# Altium PCB FIT2017 Uno Shield.PcbDoc
Units mil, origin at the board's own origin, x right, y up, seen from the top; angles counter-clockwise.
Board outline 2600 x 2100 mil, 2 copper layers (Top Layer, Bottom Layer); 9 components, 34 nets, 58 pads, 4 vias.
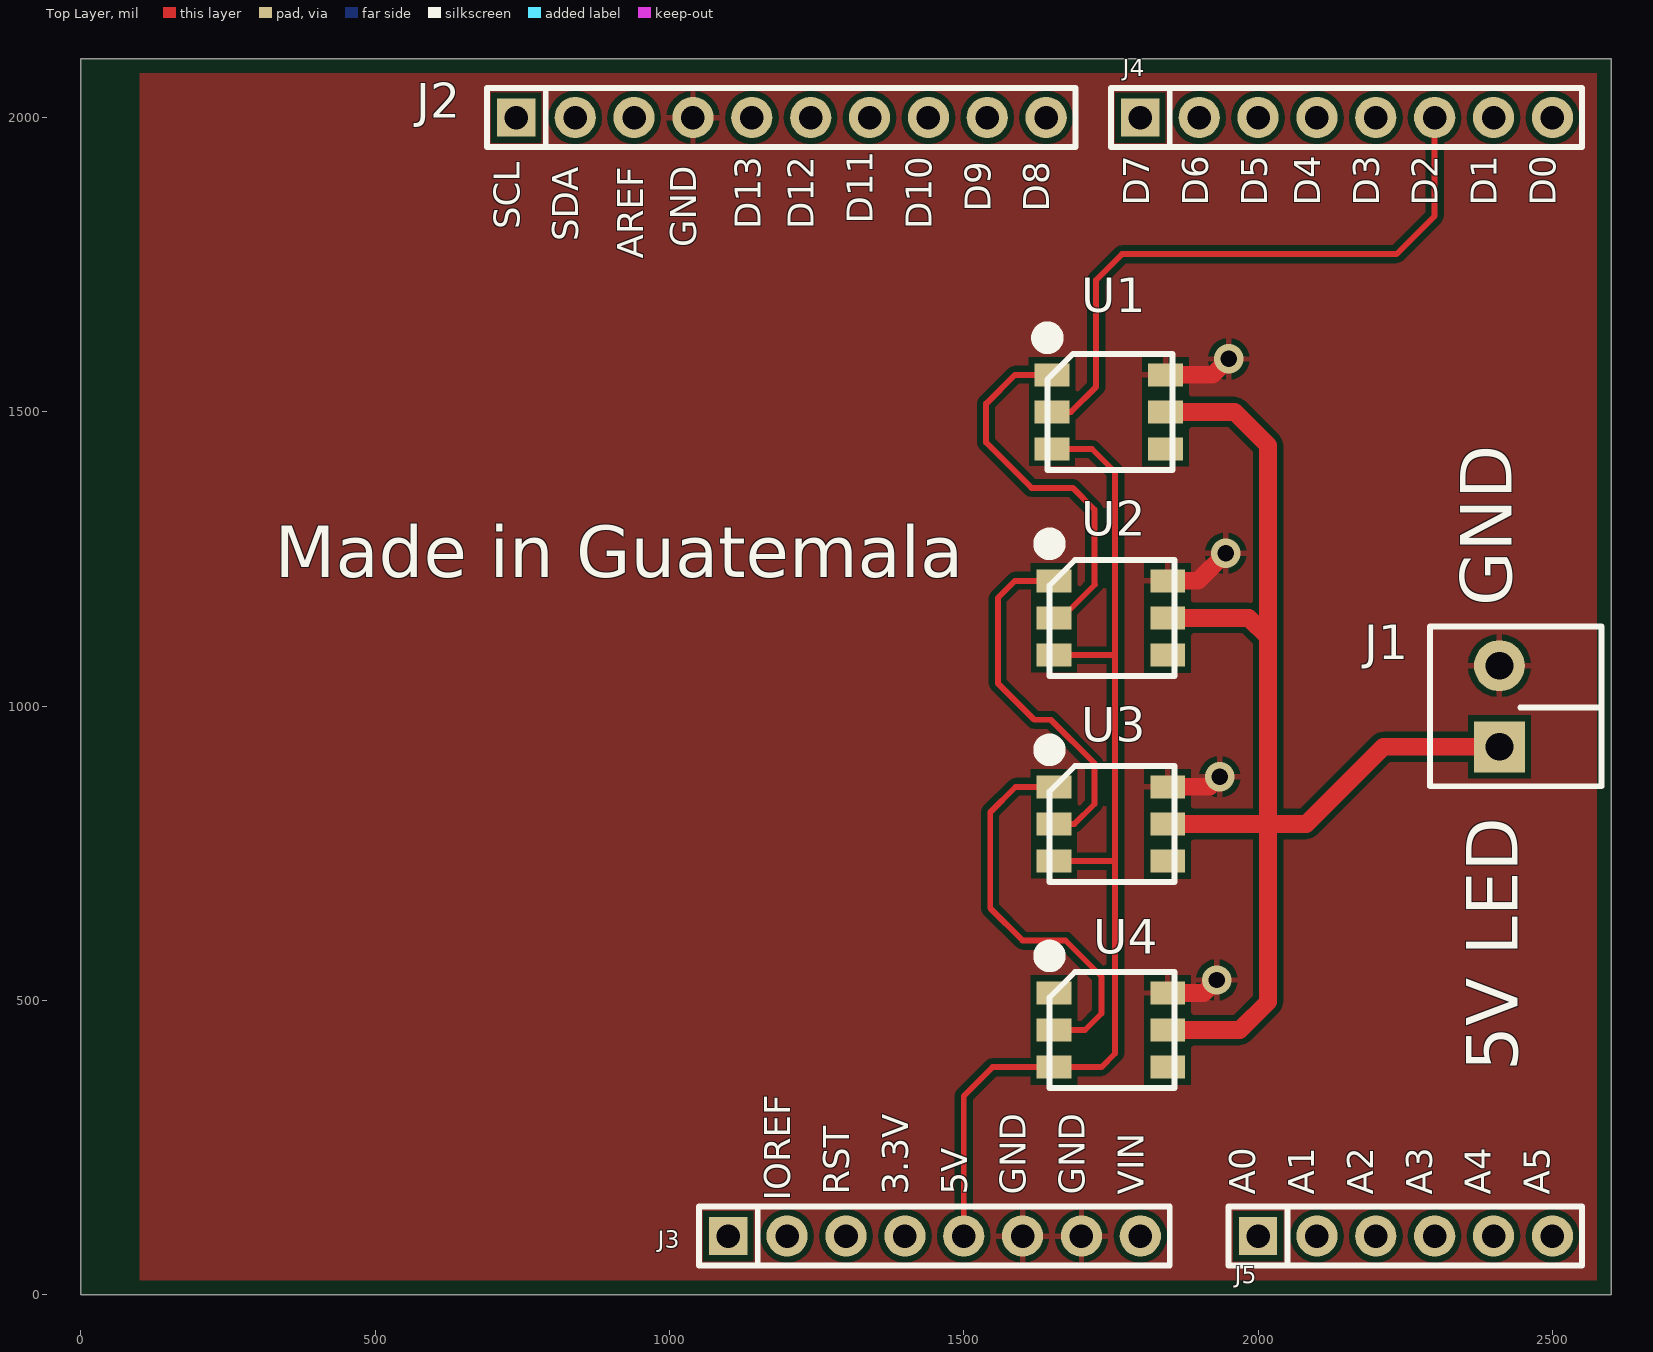
[diagram p0: Top Layer view]
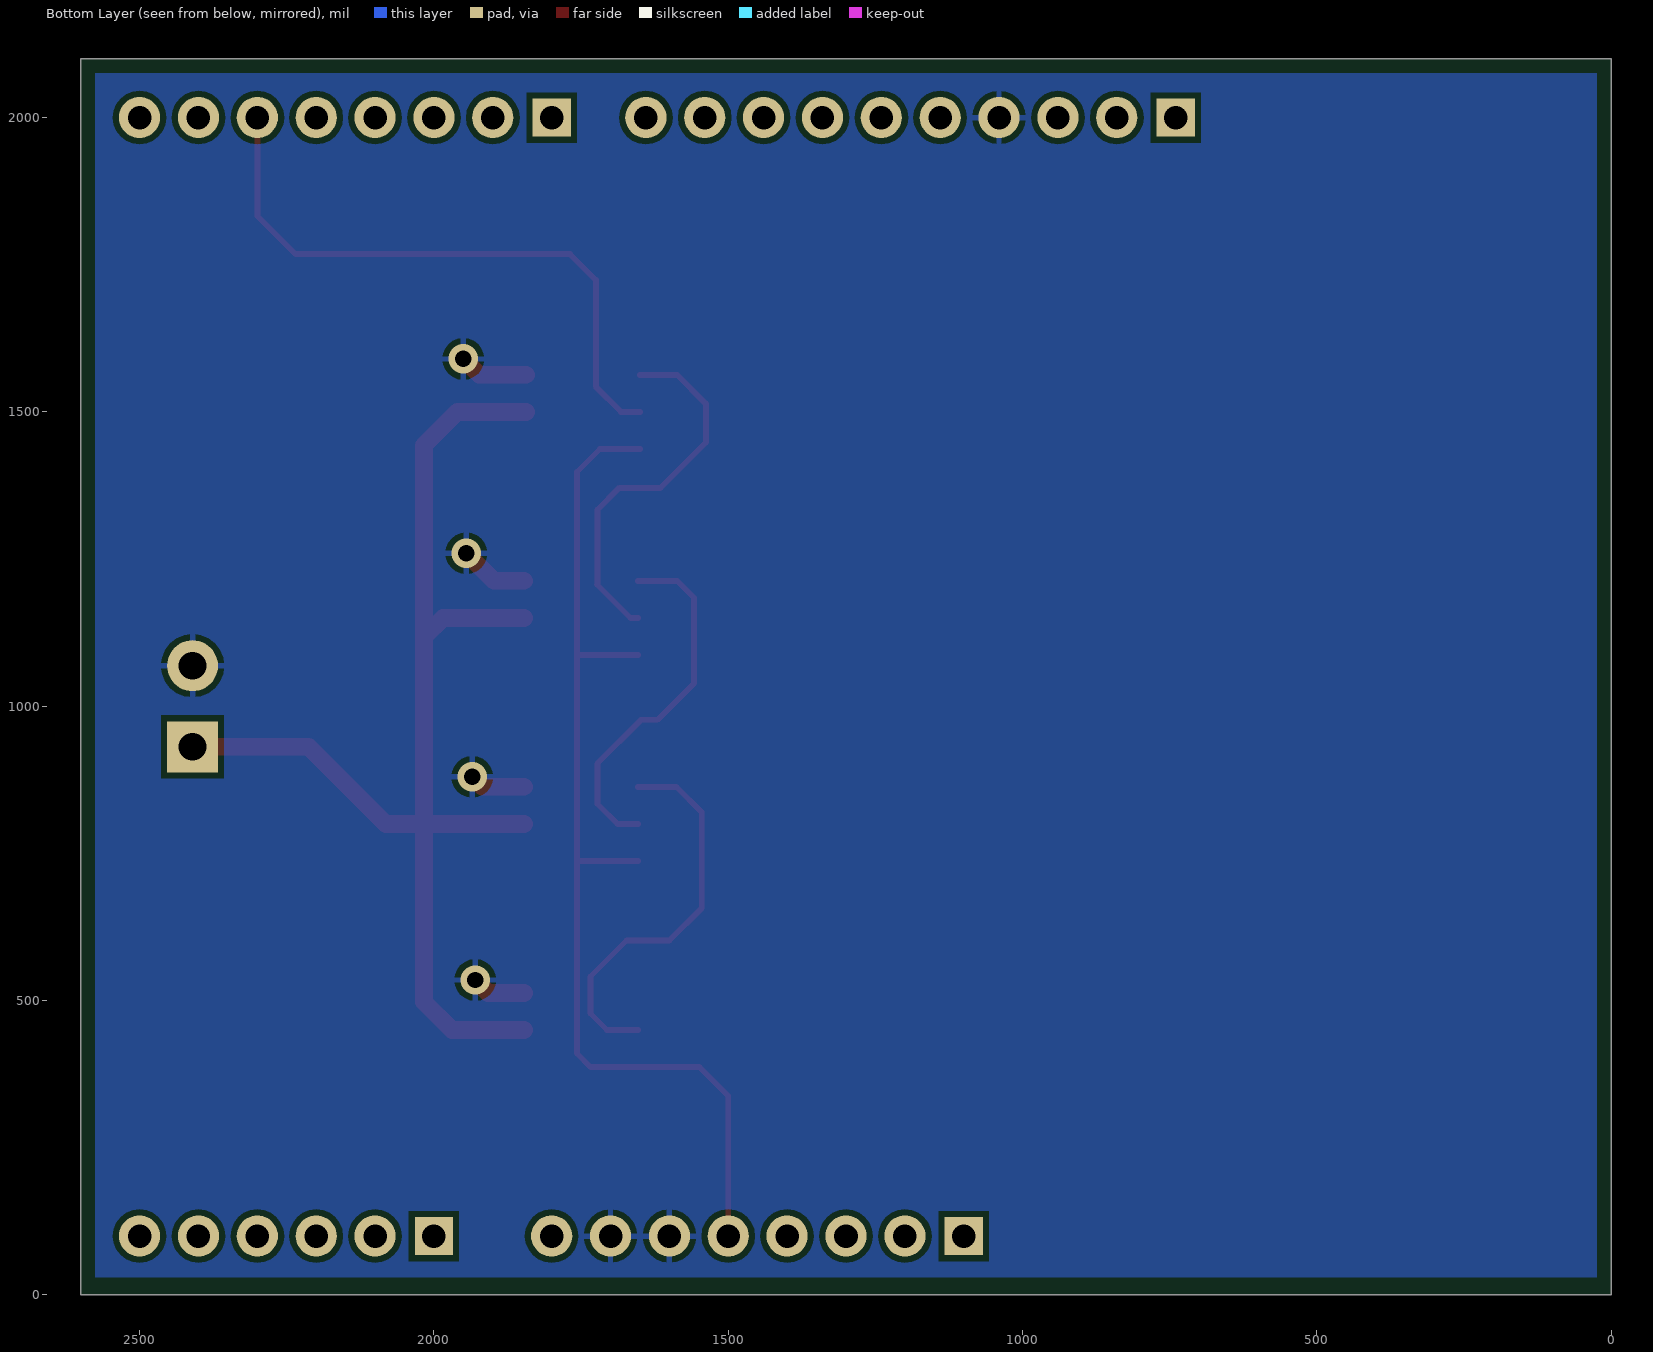
[diagram p1: Bottom Layer view, seen from below]
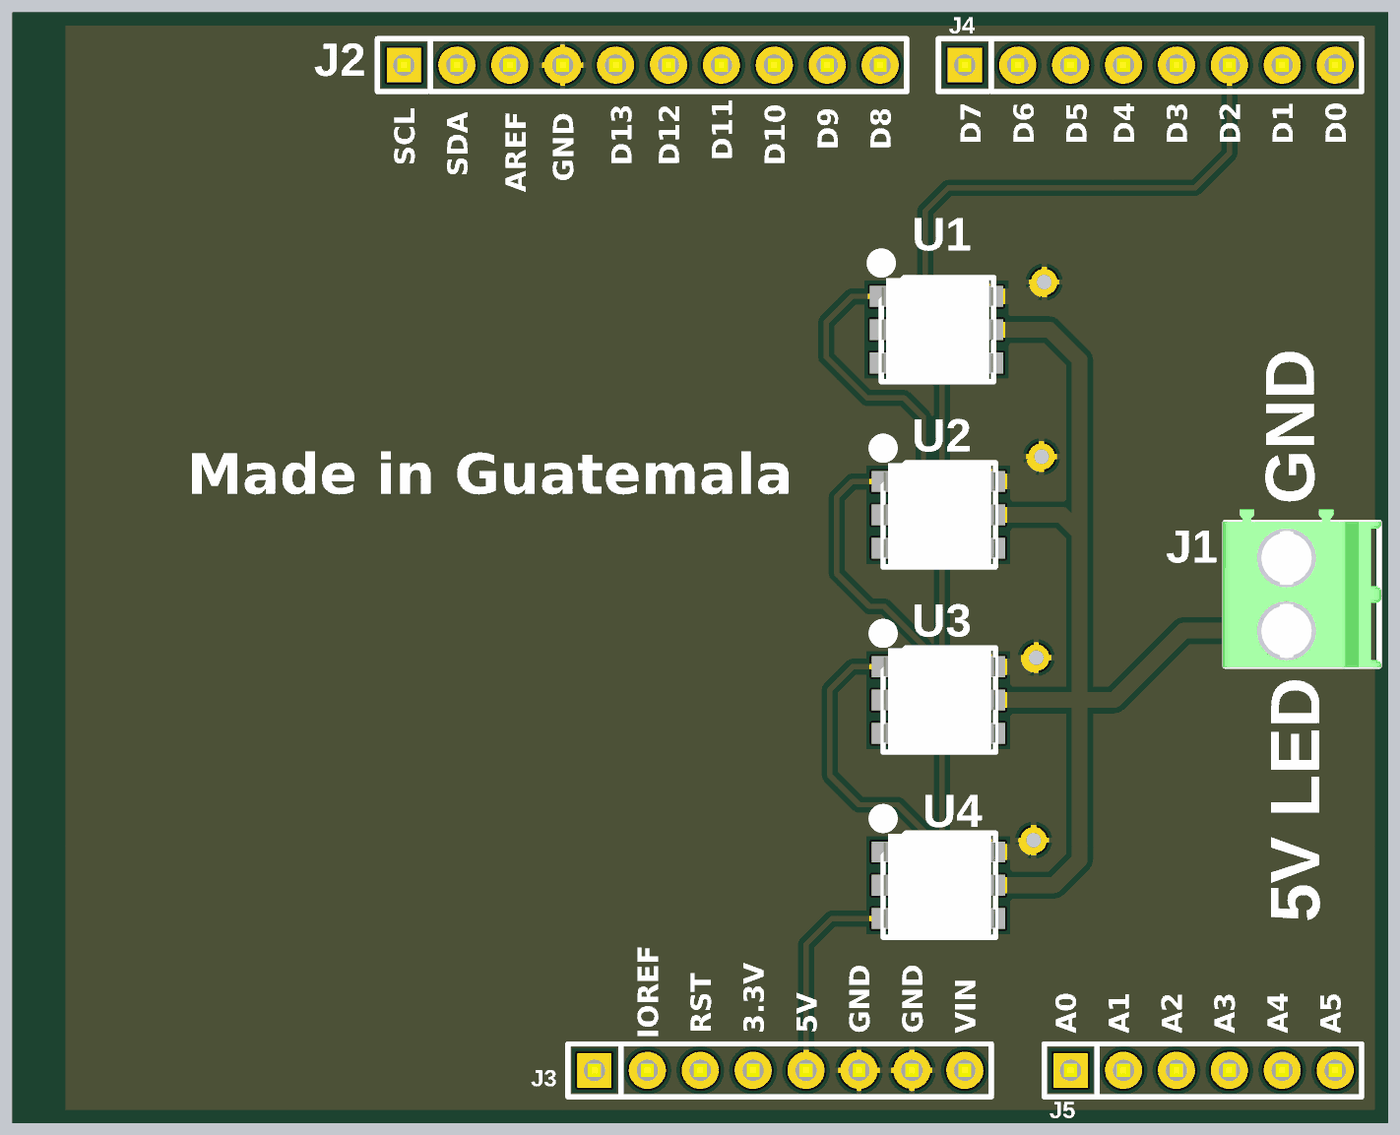
[diagram p2: 3D render of the assembled board from above, using the file's embedded part models]

## Layer stack, top to bottom
Top Solder: solder mask 0.4, Solder Resist, Dk 3.5
Top Layer: signal copper 1.4
Dielectric 1: dielectric 12.6, FR-4, Dk 4.8
Bottom Layer: signal copper 1.4
Bottom Solder: solder mask 0.4, Solder Resist, Dk 3.5

## Board outline
0,0 2600,0 2600,2100 0,2100

## Design rules (kind name [scope] priority, off if disabled: settings)
Clearance [All] p1: gap=10 ignorepadtopadclearanceinfootprint=FALSE except(0: Arc-Hole Track-Hole SMDPad-Hole THPad-Hole Via-Hole Fill-Hole Poly-Hole Region-Hole Text-Hole)
PolygonConnect [All] p1: connectstyle=Relief reliefconductorwidth=10 reliefentries=4 polygonreliefangle="90 Angle" airgapwidth=10
RoutingVias [All] p1: holewidth=28 width=50 viastyle="Through Hole" minholewidth=28 minwidth=50 maxholewidth=28 maxwidth=50
SolderMaskExpansion [All] p1: expansion=4
Width [All] p1: maxlimit=50 minlimit=10 preferedwidth=10
30 further rules are at their usual default settings.

## Components (designator, comment, footprint, x,y, rotation, side; value= is the part's Value field where it differs from the comment)
J1 "1984617" 1984617 2410,1000 r90 top
J2 "68000-410HLF" "68000-410HLF_Bottom Mount" 740,2000 r0 top
J3 "68000-408HLF" "68000-408HLF_Bottom Mount" 1100,100 r0 top
J4 "68000-408HLF" "68000-408HLF_Bottom Mount" 1800,2000 r0 top
J5 "68000-406HLF" "68000-406HLF_Bottom Mount" 2000,100 r0 top
U1 "*" WS2812 1746.46,1500 r0 top
U2 "*" WS2812 1750,1150 r0 top
U3 "*" WS2812 1750,800 r0 top
U4 "*" WS2812 1750,450 r0 top

## Footprints (in the part's own frame and the unit in brackets; to place one, negate y for a bottom-side part, rotate by r counter-clockwise, add the part's x,y. Pads: shape width x height; smd on the part's side, far side on the other; paste and mask are expansions set on the pad)
"68000-406HLF_Bottom Mount" [mil] "6-pin Header \"Bottom Mounted\""
  rect 65x65 hole 40: 1(0,0)
  round 70 hole 40: 2(100,0) 3(200,0) 4(300,0) 5(400,0) 6(500,0)
  silkscreen extent -50,-50 550,50, body extent -55,-50 550,50, height 230
"68000-408HLF_Bottom Mount" [mil] "8-pin Header \"Bottom Mounted\""
  rect 65x65 hole 40: 1(0,0)
  round 70 hole 40: 2(100,0) 3(200,0) 4(300,0) 5(400,0) 6(500,0) 7(600,0) 8(700,0)
  silkscreen extent -50,-50 750,50, body extent -50,-50 755,50, height 230
"68000-410HLF_Bottom Mount" [mil] "10-pin Header \"Bottom Mounted\""
  rect 65x65 hole 40: 1(0,0)
  round 70 hole 40: 2(100,0) 3(200,0) 4(300,0) 5(400,0) 6(500,0) 7(600,0) 8(700,0) 9(800,0) 10(900,0)
  silkscreen extent -50,-50 950,50, body extent -55,-50 950,50, height 230
1984617 [mm] "Phoenix 2-pin 3.5mm screw terminal"
  rect 2.2x2.2 hole 1.2: 1(-1.75,0)
  round 2.2 hole 1.2: 2(1.75,0)
  silkscreen extent -3.45,-4.4 3.45,3, body extent -3.51,-4.5 4.06,3.1, height 9.05
WS2812 [mm]
  rect 1.5x1 smd: 1(-2.45,1.6) 2(-2.45,0) 3(-2.45,-1.6) 4(2.45,-1.6) 5(2.45,0) 6(2.45,1.6)
  silkscreen extent -2.85,-2.5 2.75,3.4, body extent -2.62,-2.47 2.73,2.48, height 1.6

## Part data
J1: "CONN TERM BLOCK T/H 2POS 3.5MM", Color=Green, Current=10A, Manufacturer="Phoenix Contact", Operating Temperature=-, Supplier Part Number 1=277-1721-ND, Voltage=300V, Category="Connectors, Interconnects", Clamp Material - Plating=-, ComponentLink1Description=http://media.digikey.com/pdf/Data%20Sheets/Phoenix%20Contact%20PDFs/1984617.pdf, ComponentLink1URL=http://media.digikey.com/pdf/Data%20Sheets/Phoenix%20Contact%20PDFs/1984617.pdf, Contact Material - Plating=-, Features="Interlocking (Side)", Housing Material="Polyamide (PA), Nylon", Manufacturer Part Number=1984617, Mating Orientation="Horizontal with Board", Mounting Type="Through Hole", Number of Levels=1, Packaging=Bulk, Pitch="0.138\" (3.50mm)", Positions Per Level=2, Pricing 1="1=0.34, 10=0.322, 50=0.308, 100=0.2996, 250=0.28, 500=0.2576, 1000=0.238 (USD)", RoHS="RoHS Compliant", Screw Material - Plating=-, Screw Thread=M2, Stock 1=10915, Supplier 1=Digi-Key, Torque - Screw="0.22-0.25 Nm (1.9-2.2 Lb-In)", Wire Gauge="16-26 AWG", Wire Termination="Screw - Rising Cage Clamp"
J2: "10 Positions Header, Unshrouded Connector 0.100\" (2.54mm) Through Hole Tin", Case/Package=100, Colour=Black, Current Rating=3A, Flammability Rating="UL94 V-0", Insulation Resistance=5GR, Manufacturer="Amphenol FCI", Max Operating Temperature=125°C, Max Voltage Rating (AC)=1.5kV, Min Operating Temperature=-65°C, ComponentLink1Description=https://datasheet.ciiva.com/728/68000-728932.pdf, ComponentLink1URL=https://datasheet.ciiva.com/728/68000-728932.pdf, ComponentLink2Description=https://datasheet.ciiva.com/10140/68000-10140107.pdf, ComponentLink2URL=https://datasheet.ciiva.com/10140/68000-10140107.pdf, Connector Type="Male Pin", Contact Gender=Male, Contact Material=Bronze, Contact Mating Length=0.23inch, Contact Plating=Nickel,Tin, Depth=2.41mm, Gender=Male, Housing Colour=Black, Housing Material=Thermoplastic, Length=25.4mm, Manufacturer Part Number=68000-410HLF, Mating Post Length=5.84mm, Mount="Through Hole", Number of Contacts=10, Number of Positions=10, Number of Rows=1, Orientation=Straight, Package Quantity=100, Packaging=Bulk, Pitch=2.54mm, Pricing 1="600=0.1616, 1200=0.1577, 2400=0.1542, 3600=0.1508, 6000=0.1489 (USD)", REACH SVHC="No SVHC", Stock 1=0, Supplier 1=Avnet, Supplier Part Number 1=68000-410HLF, Termination=Solder, Termination Post Length=2.41mm, Voltage Rating=1.5kV
J3 J4: "CONN HEADER 8POS .100 STR TIN", Current Rating=-, Insulation Color=Black, Manufacturer="Amphenol FCI", Material Flammability Rating="UL94 V-0", Supplier Part Number 1=609-3264-ND, Applications=-, Category="Connectors, Interconnects", ComponentLink1Description=http://portal.fciconnect.com/Comergent//fci/drawing/68000.pdf, ComponentLink1URL=http://portal.fciconnect.com/Comergent//fci/drawing/68000.pdf, Connector Type=Header, Contact Finish - Mating=Tin, Contact Finish - Post=Tin, Contact Finish Thickness - Mating="100µin (2.54µm)", Contact Finish Thickness - Post=-, Contact Length - Mating="0.230\" (5.84mm)", Contact Length - Post="0.095\" (2.41mm)", Contact Material="Phosphor Bronze", Contact Shape=Square, Contact Type="Male Pin", Fastening Type=Push-Pull, Features=-, Ingress Protection=-, Insulation Height="0.100\" (2.54mm)", Insulation Material=-, Manufacturer Part Number=68000-408HLF, Mated Stacking Heights=-, Mounting Type="Through Hole", Number of Positions=8, Number of Positions Loaded=All, Number of Rows=1, Operating Temperature=-, Overall Contact Length="0.425\" (10.80mm)", Packaging=Bulk, Part Status=Active, Pitch - Mating="0.100\" (2.54mm)", Pricing 1="1=0.27, 10=0.256, 100=0.1789, 500=0.1533, 1000=0.12775, 5000=0.1095, 10000=0.1022 (USD)", RoHS="RoHS Compliant", Row Spacing - Mating=-, Shrouding=Unshrouded, Stock 1=4195, Style="Board to Board", Supplier 1=Digi-Key, Termination=Solder, Voltage Rating=-
J5: "CONN HEADER 6POS .100 STR TIN", Current Rating=-, Insulation Color=Black, Manufacturer="Amphenol FCI", Material Flammability Rating="UL94 V-0", Supplier Part Number 1=609-3263-ND, Applications=-, Category="Connectors, Interconnects", ComponentLink1Description=http://portal.fciconnect.com/Comergent//fci/drawing/68000.pdf, ComponentLink1URL=http://portal.fciconnect.com/Comergent//fci/drawing/68000.pdf, Connector Type=Header, Contact Finish - Mating=Tin, Contact Finish - Post=Tin, Contact Finish Thickness - Mating="100µin (2.54µm)", Contact Finish Thickness - Post=-, Contact Length - Mating="0.230\" (5.84mm)", Contact Length - Post="0.095\" (2.41mm)", Contact Material="Phosphor Bronze", Contact Shape=Square, Contact Type="Male Pin", Fastening Type=Push-Pull, Features=-, Ingress Protection=-, Insulation Height="0.100\" (2.54mm)", Insulation Material=-, Manufacturer Part Number=68000-406HLF, Mated Stacking Heights=-, Mounting Type="Through Hole", Number of Positions=6, Number of Positions Loaded=All, Number of Rows=1, Operating Temperature=-, Overall Contact Length="0.425\" (10.80mm)", Packaging=Bulk, Part Status=Active, Pitch - Mating="0.100\" (2.54mm)", Pricing 1="1=0.25, 10=0.233, 100=0.1615, 500=0.13662, 1000=0.11178, 5000=0.09936, 10000=0.09005 (USD)", RoHS="RoHS Compliant", Row Spacing - Mating=-, Shrouding=Unshrouded, Stock 1=12972, Style="Board to Board", Supplier 1=Digi-Key, Termination=Solder, Voltage Rating=-

## Via types
v1: diameter 50, hole 28, Top Layer to Bottom Layer, 4 vias

## Nets (pads, with @x,y where several pads share a name; then routed paths per layer and width w, separated by ;. In a path a pad name is that pad's centre, name@x,y a point inside that pad or via, vN(x,y) a via of type N, cw(c..) or ccw(c..) an arc to the next point about the centre after c; other vN are vias at no path point)
3.3V: J3.4
5V: J3.5 U1.3 U2.3 U3.3 U4.3 | length 1845.8
  Top Layer w10: J3.5 1500,338 1549.01,387.01 U4.3 1734.01,387.01 1757,410 1757,739 ; U1.3 1717.99,1437.01 1757,1398 1757,1082 ; U3.3 1755.01,737.01 1757,739 ; U2.3 1751.99,1087.01 1757,1082 ; 1757,739 1757,1082
5V_LED: J1.1 U1.5 U2.5 U3.5 U4.5 | length 2135.2
  Top Layer w30: U1.5 1960,1500 2017,1443 2017,1117 ; U4.5 1969,450 2017,498 2017,800 ; U3.5 2017,800 ; U2.5 1984,1150 2017,1117 ; J1.1 2213.1,931.1 2082,800 2017,800 ; 2017,800 2017,1117
A0: J5.1
A1: J5.2
A2: J5.3
A3: J5.4
A4: J5.5
A5: J5.6
AREF: J2.3
D0: J4.8
D1: J4.7
D2: J4.6 U1.2 | length 1061
  Top Layer w10: U1.2 1682,1500 1725,1543 1725,1724 1769,1768 2235,1768 2300,1833 J4.6
D3: J4.5
D4: J4.4
D5: J4.3
D6: J4.2
D7: J4.1
D8: J2.10
D9: J2.9
D10: J2.8
D11: J2.7
D12: J2.6
D13: J2.5
GND: J1.2 J2.4 J3.6 J3.7 U1.6 U2.6 U3.6 U4.6 | length 424.5
  Top Layer w30: U1.6 1922.99,1562.99 v1(1950,1590) ; U4.6 1907.99,512.99 v1(1930,535) ; U3.6 1917.99,862.99 v1(1935,880) ; U2.6 1897.99,1212.99 v1(1945,1260)
IOREF: J3.2
NC: J3.1
NetU1_1: U1.1 U2.2 | length 650
  Top Layer w10: U1.1 1586.99,1562.99 1538,1514 1538,1448 1615,1371 1685,1371 1722,1334 1722,1208 1723,1207 1666,1150 U2.2
NetU2_1: U2.1 U3.2 | length 624.4
  Top Layer w10: U3.2 1688,800 1722,834 1722,903 1648,977 1620,977 1558,1039 1558,1184 1586.99,1212.99 U2.1
NetU3_1: U3.1 U4.2 | length 681.5
  Top Layer w10: U4.2 1706,450 1734,478 1734,541 1673,602 1600,602 1545,657 1545,820 1587.99,862.99 U3.1
RESET: J3.3
SCL: J2.1
SDA: J2.2
VIN: J3.8
pads on no net: U1.4 U2.4 U3.4 U4.1 U4.4

## Polygon pours and split planes (outlines as drawn)
GND on Top Layer "Top Layer GND" (solid, pour order 0): 100,2075 2575,2075 2575,25 100,25
GND on Bottom Layer "Bottom Layer GND" (solid, pour order 2): 25,30 25,2075 2575,2075 2575,30

## Silkscreen, mask and mechanical layers (free items; w line width, h text height)
Top Overlay:
  text "D7" at 1830,1850 h75 r90
  text "D6" at 1930,1850 h75 r90
  text "D5" at 2030,1850 h75 r90
  text "D4" at 2120,1850 h75 r90
  text "D3" at 2220,1850 h75 r90
  text "D2" at 2320,1850 h75 r90
  text "D1" at 2420,1850 h75 r90
  text "D0" at 2520,1850 h75 r90
  text "D9" at 1560,1840 h75 r90
  text "D8" at 1660,1840 h75 r90
  text "D11" at 1360,1820 h75 r90
  text "SCL" at 760,1810 h75 r90
  text "D13" at 1170,1810 h75 r90
  text "D12" at 1260,1810 h75 r90
  text "D10" at 1460,1810 h75 r90
  text "SDA" at 860,1790 h75 r90
  text "GND" at 1060,1780 h75 r90
  text "AREF" at 970,1760 h75 r90
  text "Made in Guatemala" at 330,1190 h150
  text "GND" at 2460,1170 h150 r90
  text "5V LED" at 2470,380 h150 r90
  text "RST" at 1320,170 h75 r90
  text "3.3V" at 1420,170 h75 r90
  text "5V" at 1520,170 h75 r90
  text "GND" at 1620,170 h75 r90
  text "GND" at 1720,170 h75 r90
  text "VIN" at 1820,170 h75 r90
  text "A0" at 2010,170 h75 r90
  text "A1" at 2110,170 h75 r90
  text "A2" at 2210,170 h75 r90
  text "A3" at 2310,170 h75 r90
  text "A4" at 2410,170 h75 r90
  text "A5" at 2510,170 h75 r90
  text "IOREF" at 1220,160 h75 r90
Mechanical 1:
  the board outline again, w10